# Altium PCB ExG_shield_old.PcbDoc (part 2 of 3)
Units mm, origin at the board's own origin, x right, y up, seen from the top; angles counter-clockwise.
Board outline 21.95 x 29 mm, 6 copper layers (Top Layer, GND/PWR1, SIG1, SIG2, GND/PWR2, Bottom Layer), stack 0.957 mm thick; 110 components, 127 nets, 621 pads, 432 vias.
Unrouted connection lines stored in the file: 2.
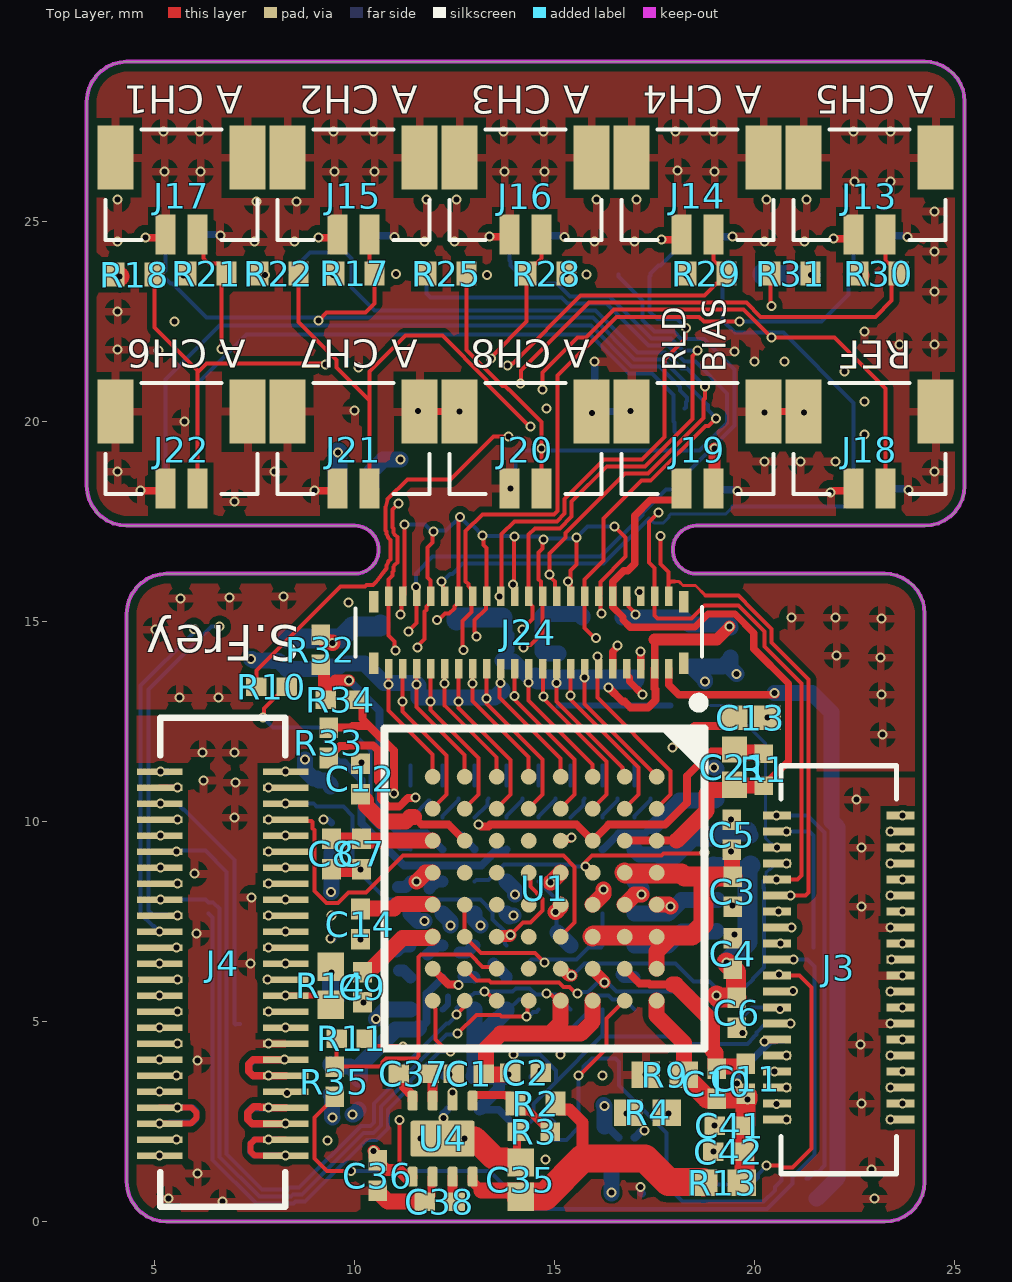
[diagram p0: Top Layer view]

## Via types
v1: diameter 0.25, hole 0.15, Top Layer to Bottom Layer, tented both sides, 308 vias
v2: diameter 0.25, hole 0.15, Top Layer to SIG1, tented both sides, 72 vias
v3: diameter 0.25, hole 0.15, SIG2 to Bottom Layer, tented both sides, 46 vias
v4: diameter 0.25, hole 0.15, Top Layer to GND/PWR1, tented both sides, 3 vias
v5: diameter 0.25, hole 0.15, Top Layer to Bottom Layer, 2 vias
v6: diameter 0.25, hole 0.15, GND/PWR2 to Bottom Layer, tented both sides, 1 vias

## Nets (pads, with @x,y where several pads share a name; then routed paths per layer and width w, separated by ;. In a path a pad name is that pad's centre, name@x,y a point inside that pad or via, vN(x,y) a via of type N, cw(c..) or ccw(c..) an arc to the next point about the centre after c; other vN are vias at no path point) (continued)
ADS_BIAS: (continued)
  Top Layer w0.3: R32.2@9.15,13.921 9.236,13.835 9.236,13.43 ; v1(9.86,13.536) 9.525,13.536 9.328,13.339 ; 9.236,13.43 9.236,13.089 R34.1@9.275,13.05 9.328,13.103 9.328,13.339 ; 9.236,13.43 9.328,13.339
  Bottom Layer w0.2: v1(9.86,13.536) 10.625,12.771 10.625,10.2 11.125,9.7 11.8,9.7 U2.B3@12.2,9.3